# EAGLE board sensor (EAGLE 7.5.0)

Size 100 x 80 mm. Coordinates in mm from the lower left corner, seen from the top.
Outline: 0,0 100,0 100,80 0,80 0,0
Copper layers (1*16): Top 0.035mm / dielectric 1.5mm / Bottom 0.035mm
Design rules "default": minimum track width 10mil, minimum drill 24mil, track to track 8mil, track to pad 8mil, pad to pad 8mil, via to via 8mil, smd to smd 8mil, copper to edge 40mil, drill to drill 8mil, minimum pad ring 10mil, minimum via ring 8mil, stop-mask expansion 4mil, vias tented up to drill 0mil, thermal gap 10mil

## Footprints (pad centres in the part's own frame; a part is rotated, then mirrored left to right if it is on the bottom)
DIL16 = drill 0.813 long: 1 -8.89,-3.81; 2 -6.35,-3.81; 3 -3.81,-3.81; 4 -1.27,-3.81; 5 1.27,-3.81; 6 3.81,-3.81; 7 6.35,-3.81; 8 8.89,-3.81; 9 8.89,3.81; 10 6.35,3.81; 11 3.81,3.81; 12 1.27,3.81; 13 -1.27,3.81; 14 -3.81,3.81; 15 -6.35,3.81; 16 -8.89,3.81
WROOM-02 = smd 0.9 x 0.9: 1 -8.55,2.9; 2 -8.55,1.4; 3 -8.55,-0.1; 4 -8.55,-1.6; 5 -8.55,-3.1; 6 -8.55,-4.6; 7 -8.55,-6.1; 8 -8.55,-7.6; 9 -8.55,-9.1; 10 8.55,-9.1; 11 8.55,-7.6; 12 8.55,-6.1; 13 8.55,-4.6; 14 8.55,-3.1; 15 8.55,-1.6; 16 8.55,-0.1; 17 8.55,1.4; 18 8.55,2.9
0309/12 = drill 0.813 octagon: 1 -6.35,0; 2 6.35,0
B3F-10XX = drill 1.016 long: 1 -3.251,2.261; 2 3.251,2.261; 3 -3.251,-2.261; 4 3.251,-2.261
AQM0802 = drill 0.8 offset: CAP1N -3,-8; CAP1P -1.5,-8; SCL 4.5,-8; SDA 3,-8; V0 -6,-8; VDD 0,-8; VOUT -4.5,-8; VSS 1.5,-8; XRESETB 6,-8
SW520D(振動センサー) = drill 0.8 square: P$1 -1.27,0; P$2 1.27,0
LM35 = drill 0.8 square: P$1 -2.54,0; P$2 0,0; P$3 2.54,0
HR202L = drill 0.8 square: P$1 -1.27,0; P$2 1.27,0
MI527(照度センサー) = drill 0.8 square: P$1 -1.27,0; P$2 1.27,0

## Placement (x,y rotation side)
IC1  MCP3008  [DIL16]  -6.35,-6.35 0 top
IC3  ESP-WROOM-02  [WROOM-02]  -10.16,10.16 0 top
R1  10k  [0309/12]  16.51,20.32 0 top
R2  10k  [0309/12]  16.51,45.72 0 top
R3  10k  [0309/12]  16.51,31.75 0 top
R4  10k  [0309/12]  16.51,26.67 0 top
R5  10k  [0309/12]  16.51,52.07 0 top
R6  10k  [0309/12]  17.78,38.1 0 top
R7  20k  [0309/12]  16.51,58.42 0 top
R8  10k  [0309/12]  15.24,15.24 0 top
R9  10K  [0309/12]  -11.43,-38.1 0 top  (outside the outline)
R10  10K  [0309/12]  -11.43,-44.45 0 top  (outside the outline)
S1  [B3F-10XX]  31.75,15.24 0 top
S2  [B3F-10XX]  63.5,13.97 0 top
U$1  AQM0802  [AQM0802]  -3.81,-22.86 0 top  (outside the outline)
振動センサー  SW520D  [SW520D(振動センサー)]  67.31,46.99 0 top
温度センサー  LM35  [LM35]  45.72,52.07 0 top
湿度センサー  HR202L  [HR202L]  43.18,67.31 0 top
照度センサー  MI527  [MI527(照度センサー)]  34.29,59.69 0 top

## Library data of the parts
IC1 IC3 R9 R10 U$1 = sensor
R1-R8 振動センサー 温度センサー 湿度センサー 照度センサー = MyLibraries
S1 S2 = MyLibraries; MPN: B3F-1000; OC_FARNELL: 176432; OC_NEWARK: 36M3542

## Nets
+3.3V: IC1.15 IC1.16 IC3.1 R2.1 R3.1 R4.1 R5.2 R6.2 R7.2 R8.2 R9.2 R10.2 U$1.VDD 温度センサー.P$1
AGND: IC1.9 IC1.14
GND: IC1.5 IC1.6 IC1.7 IC1.8 R1.1 S1.1 S2.3 U$1.VSS 振動センサー.P$2 温度センサー.P$3 湿度センサー.P$2 照度センサー.P$2
GND1: IC3.9
GND3: IC3.13 IC3.18
N$1: IC1.10 IC3.6 R1.2
N$2: IC1.11 IC3.5
N$3: IC1.12 IC3.4
N$5: IC3.7 R2.2
N$6: IC1.2 R6.1 照度センサー.P$1
N$8: IC1.13 IC3.3
N$9: IC3.15 IC3.17 R4.2 S2.1 U$1.XRESETB
N$10: IC3.8 R3.2 S1.3
N$11: IC1.1 温度センサー.P$2
N$12: IC1.3 R7.1 湿度センサー.P$1
N$13: IC1.4 R8.1 振動センサー.P$1
N$14: IC3.14 R10.1 U$1.SCL
N$15: IC3.2 R5.1
N$16: IC3.10 R9.1 U$1.SDA

## Tracks (layer width: path | path; a pad name or v marks a point on that pad's centre or on a via)
+3.3V  (13 unrouted)
AGND  (1 unrouted)
GND  (11 unrouted)
GND3  (1 unrouted)
N$1  (2 unrouted)
N$2  (1 unrouted)
N$3  (1 unrouted)
N$5  (1 unrouted)
N$6  (2 unrouted)
N$8  (1 unrouted)
N$9  (4 unrouted)
N$10  (2 unrouted)
N$11  (1 unrouted)
N$12  (2 unrouted)
N$13  (2 unrouted)
N$14  (2 unrouted)
N$15  (1 unrouted)
N$16  (2 unrouted)